# Altium PCB Copy of corePCB1.PcbDoc (part 2 of 2)
Units mil, origin at the board's own origin, x right, y up, seen from the top; angles counter-clockwise.
Board outline 6000 x 4000 mil, 4 copper layers (Top Layer, Layer 1, Layer 2, Bottom Layer), stack 23.756 mil thick; 90 components, 166 nets, 637 pads, 207 vias.
Unrouted connection lines stored in the file: 273.
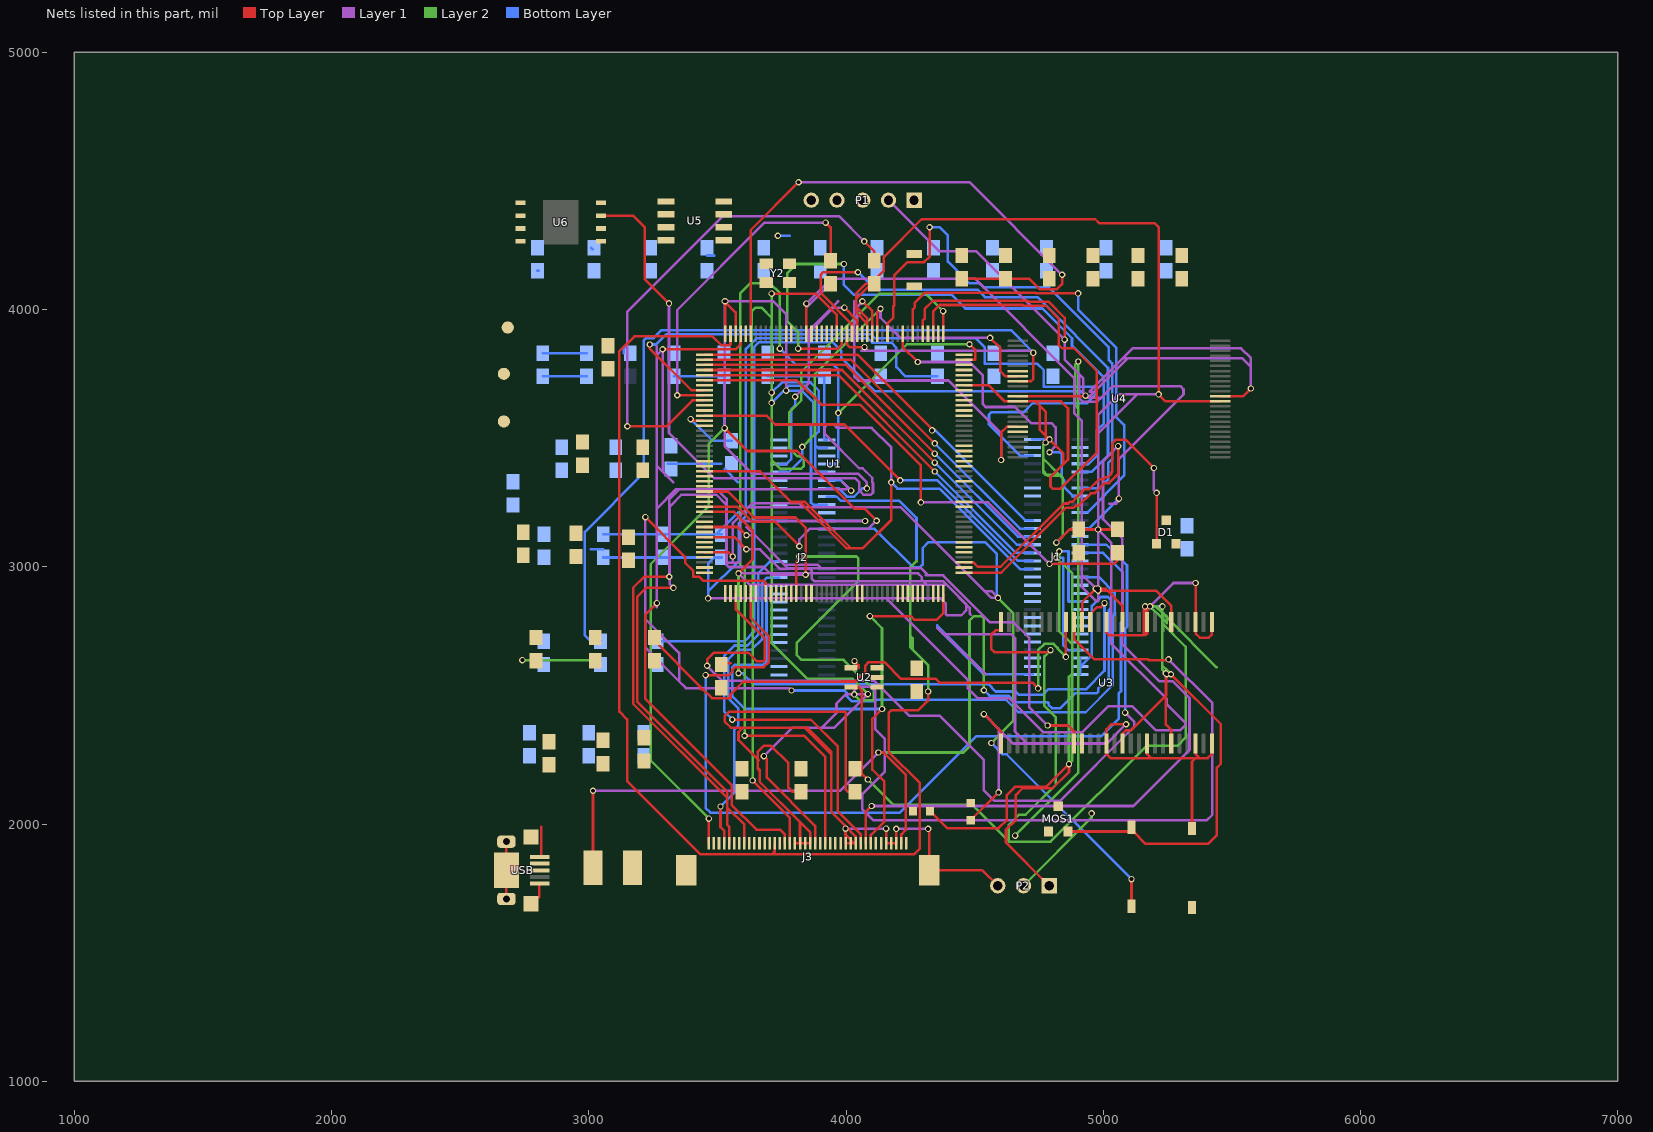
[diagram p4: the nets of this part, all layers, seen from the top]

## Via types
v1: diameter 25, hole 15, Top Layer to Bottom Layer, 207 vias

## Nets (pads, with @x,y where several pads share a name; then routed paths per layer and width w, separated by ;. In a path a pad name is that pad's centre, name@x,y a point inside that pad or via, vN(x,y) a via of type N, cw(c..) or ccw(c..) an arc to the next point about the centre after c; other vN are vias at no path point) (continued)
FMC_NCE3: R17.2 U1.152 U4.9 | length 3861.5
  Top Layer w10: U1.152@4003.76,3905.33 4003.76,3864 4013.76,3854 v1(4072,3854) ; U4.9@4667.6,3721.53 4720,3721.53 4728,3729.53 v1(4728,3831)
  Layer 1 w10: 4059,3839 4072,3839 4075,3839 4087,3839 ; v1(4072,3854) 4087,3839 ; v1(4728,3831) 4727,3832 v1@4720,3839 ; v1(4728,3833) 4722,3839 v1@4720,3839 ; 4087,3839 v1@4720,3839
  Bottom Layer w10: R17.2@3045.06,2710 3008,2710 2985,2733 2985,3136 3213.07,3364.07 3213.07,3880 3222.07,3889 3252,3889 3283,3920 4641,3920 v1(4728,3833)
FMC_NE1: J1.35 U1.151 | length 2030.6
  Top Layer w10: U1.151@4023.44,3905.33 4023.44,3942.57 3902.18,4063.84 3902.18,4136 3911.18,4145 v1(4046,4145)
  Bottom Layer w10: v1(4046,4145) 4114,4077 4511,4077 4540,4048 4745,4048 4892.7,3900.3 4892.7,3898.74 5018.5,3772.95 5018.5,3433.52 4954,3369.02 J1.35@4910,3369.02
FMC_NOE: J2.26 U1.146 U4.8 | length 1638.2
  Top Layer w10: U1.146@4121.87,3905.33 4121.87,3990.87 v1(4134,4003) ; v1(4560,3890) 4599.78,3850.22 4599.78,3760 4618.56,3741.22 U4.8@4667.6,3741.22
  Layer 1 w10: v1(4134,4003) 4134,3968 4212,3890 v1(4560,3890)
  Layer 2 w10: v1(3830,3466) 3878,3514 3878,3747 v1(4134,4003)
  Bottom Layer w10: J2.26@3740,3367.44 3776.44,3367.44 3830,3421 v1(3830,3466)
FMC_NWAIT: J2.27 U1.150 U4.7 | length 1044.2
  Top Layer w10: v1(3993.76,4007.24) 4043.13,3957.87 U1.150@4043.13,3905.33
  Layer 1 w10: v1(3802,3661) 3856,3715 3856,3911.28 ; 3969,4032 3856,3919 3856,3911.28 ; v1(3993.76,4007.24) 3951.97,4007.24 3856,3911.28
  Bottom Layer w10: J2.27@3740,3398.94 3768,3398.94 3787,3417.94 3787,3612 3802,3627 v1(3802,3661)
FMC_NWE: J2.22 U1.147 U4.18 | length 1482.9
  Top Layer w10: v1(4064,4032) 4102.19,3993.81 U1.147@4102.19,3905.33 ; v1(4603,3415) 4603,3522 4625.37,3544.37 U4.18@4667.6,3544.37
  Layer 1 w10: 4032,4032 4032,3944.28 ; v1(4064,4032) 4044.36,4012.36 4044.36,3956.64 4032,3944.28 ; v1(4603,3415) 4603,3519 4594,3528 4398,3724 4048,3724 4032,3740 4032,3944.28
FMC_SDCKE0: U1.35 U3.37 | length 2185.3
  Top Layer w10: U1.35@3450,3154.72 3577.77,3154.72 3588.99,3143.5 3592.5,3143.5 v1(3613.28,3122.72) ; v1(4784,2383) 4864,2383 4886.53,2360.47 U3.37@4886.53,2312.56
  Layer 1 w10: v1(3613.28,3122.72) 3645.28,3122.72 ; 3613.28,3154.72 3645.28,3122.72 ; v1(4784,2383) 4712,2455 4712,2724 4652,2784 4560,2784 4377.5,2966.5 4320,2966.5 ; 3645.28,3122.72 3759.5,3008.5 ; 3759.5,3008.5 3773.5,2994.5 3903.76,2994.5 ; 3759.5,3008.5 3889.76,3008.5 3903.76,2994.5 ; 3903.76,2994.5 4292,2994.5 4310.5,2976 ; 4310.5,2976 4320,2966.5 ; 4310.5,2976 4310.5,2966.5 4320,2966.5
FMC_SDCLK: U1.112 U3.38
FMC_SDNCAS: U1.160 U3.17 | length 2648.1
  Top Layer w10: U1.160@3846.28,3905.33 v1(3846.28,4023.28) ; U3.17@4918.03,2785 4918.03,2862.03 v1(4971,2915)
  Layer 1 w10: 3846.28,4007.28 3959,4120 ; v1(3846.28,4023.28) 3943,4120 3959,4120 ; 4971,2867 4917,2921 4917,2969 ; v1(4971,2915) 4917,2969 ; 3959,4120 4501,4120 4887,3734 4887,3597 4917,3567 4917,2969
FMC_SDNE0: R19.2 U1.34 U3.19 | length 2150
  Top Layer w10: R19.2@3255.06,2725 3255.06,2712.94 3434.72,2533.28 3434.72,2523.5 3444.5,2523.5 3479,2489 3551,2489 3551,2504 3600,2553 3983,2553 3984,2554 4037,2554 4075,2592 4075,2616 4088,2629 4149,2629 4214,2564 4349,2564 4363.19,2549.81 4724.19,2549.81 v1(4747,2527) ; v1(4855.04,2649.66) U3.19@4855.04,2785
  Layer 2 w10: v1(4747,2527) 4747,2675.94 4771.03,2699.97 4807.04,2699.97 4822.66,2684.35 4822.66,2682.04 v1(4855.04,2649.66)
FMC_SDNRAS: U1.59 U3.18 | length 6225.8
  Top Layer w10: U1.59@3806.91,2896.24 3806.91,3020 3819,3032.09 v1(3819,3040) ; U3.18@4886.53,2785 4886.53,2720 4966.53,2640 5175,2640 5178,2637 5251,2637 v1(5254,2640)
  Layer 1 w10: v1(4032,2504) 4032,2518 4048,2534 4096,2534 4113,2517 4113,2369 4150,2332 4150,2203 4064,2117 4064,2057 4107,2014 5402,2014 5424,2036 5424,2470 v1(5254,2640) ; 4485,2814 4480.91,2818.09 4480.91,2840.46 4392.03,2929.34 4315.66,2929.34 ; 4315.66,2929.34 3626.66,2929.34 3582,2974 4280.5,2974 4294.5,2960 4294.5,2950.5 4315.66,2929.34
  Layer 2 w10: v1(3819,3040) 4040,3040 4048,3032 4048,2944 3809,2705 3809,2656 3827,2638 3991,2638 4108.5,2520.5 4108.5,2482 4107.5,2481 4055,2481 v1(4032,2504)
FMC_SDNWE: U1.32 U3.16 | length 2661
  Top Layer w10: U1.32@3450,3213.78 3564.59,3213.78 3637,3141.37 3637,3029 v1(3582,2974) ; U3.16@4949.53,2785 4949.53,2816.53 4976,2843 4992,2843 5005,2856 v1(5005,2859)
  Layer 2 w10: v1(3582,2586) v1(3582,2974)
  Bottom Layer w10: v1(3582,2586) 3598,2586 3640.5,2543.5 4553.5,2543.5 4582,2515 4658.79,2515 4671.79,2502 4764,2502 4785.69,2523.69 4932.35,2523.69 5005,2596.34 v1(5005,2859)
GBC_KEY: J1.15 U1.13 | length 1509.1
  Top Layer w10: U1.13@3450,3587.8 3690.2,3587.8 3725,3553 3994,3553 v1(4211,3336)
  Bottom Layer w10: v1(4211,3336) 4355,3336 4668.44,3022.56 J1.15@4724.96,3022.56
GBC_LED: J1.45 U1.50 | length 3621.7
  Top Layer w10: v1(3454,2579) 3545,2579 3558,2592 3558,2600 3568,2610 3680,2610 3700.5,2630.5 3700.5,2729.72 3629.74,2800.48 U1.50@3629.74,2896.24
  Bottom Layer w10: v1(3454,2579) 3454,2063 3472.5,2044.5 4209.5,2044.5 4506,2341 4992,2341 5059.63,2408.63 5059.63,2507.5 5069,2516.87 5069,2782.27 5076.5,2789.77 5076.5,2977.43 4999.88,3054.06 J1.45@4910,3054.06
GND: C1.2 C2.1 C3.2 C4.1 C5.2 C6.1 C7.1 C8.1 C9.1 C10.1 C11.1 C12.2 C13.1 C14.1 C15.1 C16.1 C17.1 C18.1 C19.1 C20.1 C21.1 C22.1 C23.1 C24.1 C25.1 C26.1 C27.1 C28.1 C29.1 C30.1 C31.1 C32.1 C33.2 C34.2 C35.1 C36.1 C37.1 C38.1 C39.1 C40.1 C41.1 C42.1 C43.1 C44.2 C45.2 GND.1 J1.1 J1.30 J2.31 J3.3 J3.4 J3.5 J3.11 J3.12 J3.13 J3.20 J3.21 J3.22 J3.23 J3.29 J3.A J3.B P1.1 P2.3 PWR.2 R1.2 R4.2 R7.2 R14.1 RST.2 U1.14 U1.22 U1.37 U1.61 U1.71 U1.90 U1.102 U1.113 U1.126 U1.135 U1.148 U1.158 U2.2 U3.6 U3.12 U3.28 U3.41 U3.46 U3.52 U3.54 U4.13 U4.36 U5.1 U5.2 U5.3 U5.4 U5.7 U6.4 USB.5 USB.6 USB.7 USB.8 USB.9 Y2.2 Y2.4 | length 24725.8
  Top Layer w10: USB.7@2679.65,1708.78 2680,1708.78 USB.9@2680,1820 2680,1931.22 USB.6@2679.65,1931.22 ; USB.8@2775,1716 2807,1716 2807,1768.82 USB.5@2809,1768.82 ; v1(3396,3574) 3401.89,3568.11 U1.14@3450,3568.11 ; U1.37@3450,3115.35 3565.65,3115.35 v1(3613,3068) ; J3.23@3801.57,1925 J3.22@3821.26,1925 ; C31.1@3825.06,2125 3792,2125 3776,2141 3776,2236.5 3709,2303.5 3680,2303.5 3657.5,2281 3657.5,2250.5 ; v1(3998,1982) 3998,1959 3998.43,1958.57 ; C32.1@4035.06,2125 4008,2125 3999,2134 3999,2433 3996,2436 3545,2436 3528,2419 3528,2399 3552,2375 3600,2375 ; U1.148@4082.5,3905.33 4082.5,3945.5 ; C9.1@4110.06,4100 C9.1@4097.06,4100 ; v1(4155.91,1982) J3.5@4155.91,1925 J3.4@4175.59,1925 J3.3@4195.28,1925 v1(4195.28,1981.23) ; v1(4319,1981.23) 4323.23,1977 J3.A@4323.23,1821 ; J3.A@4323.23,1820.57 J3.A@4323.23,1821 ; U1.135@4338.41,3905.33 4338.41,3992.13 4363.78,4017.5 4687.56,4017.5 4690.06,4015 4776.5,4015 4826.5,3965 4826.5,3863 4840,3849.5 4885.5,3849.5 4975,3760 4975,3444.47 4834.53,3304 4803,3304 4795,3312 4795,3348.5 4845.39,3398.89 ; U1.126@4459.09,3705.91 4554.09,3705.91 ; PWR.2@4485,2015 v1(4593,2123) ; v1(4536,2427) 4603.07,2359.93 U3.28@4603.07,2312.56 ; P2.3@4590,1760 4529,1821 J3.A@4323.23,1821 ; v1(4776,3483) 4776,3510 ; v1(4818,3094) 4869,3145 R1.2@4905.06,3145 v1(4980,3145) C1.2@5055.06,3145 ; v1(4980,2907) 5016.51,2907 ; v1(4980,2915) 5008.51,2915 5016.51,2907 ; U3.12@5075.51,2785 5075.51,2848 5016.51,2907 ; v1(5089,2388) 5032.52,2388 5012.52,2368 U3.41@5012.52,2312.56 5012.52,2272 5028.52,2256 5186,2256 ; U3.46@5170,2312.56 5170,2272 5186,2256 ; U3.6@5264.49,2785 5264.49,2848 5205.49,2907 5016.51,2907 ; RST.2@5345,1982.09 5345,2242.02 5358.98,2256 ; U3.52@5358.98,2312.56 5358.98,2272 5374.98,2256 ; U3.54@5421.97,2312.56 5421.97,2272 5405.97,2256 5374.98,2256 ; U4.36@5455,3642.79 5242.21,3642.79 v1(5215,3670) 5215,4320 5199,4336 4984,4336 4969,4351 4294,4351 4146.06,4203.06 4146.06,4149 C9.1@4097.06,4100 ; 3600,2375 3582,2357 3582,2326 3657.5,2250.5 ; 3600,2375 3838,2375 ; 3657.5,2247 3661,2247 3657.5,2250.5 ; 3657.5,2247 3657,2247 3657,2214 3661,2214 ; 3657.5,2247 3657.5,2250.5 ; 3657.5,2247 3657.5,2217.5 3661,2214 ; 3661,2214 3664.73,2210.27 3664.73,2206.27 ; 3661,2214 3661,2210 3664.73,2206.27 ; 3664.73,2206.27 3664.73,2163.9 3821.26,2007.37 ; J3.22@3821.26,1925 3821.26,2007.37 ; J3.22@3821.26,1925 J3.21@3840.94,1925 J3.20@3860.63,1925 3860.63,1968 3821.26,2007.37 ; 3838,2375 3848,2375 3943,2280 3943,2270 ; 3838,2375 3943,2270 ; 3943,2047 3943,2046.8 v1@3998.43,1991.37 ; 3943,2047 3943,2270 ; 3943,2047 3998.43,1991.57 v1@3998.43,1991.37 ; 3998.43,1958.57 4032,1925 ; 3998.43,1958.57 v1@3998.43,1991.37 ; 3998.43,1958.57 J3.13@3998.43,1925 J3.12@4018.11,1925 4032,1925 ; v1@3998.43,1991.37 4037.8,1952 J3.11@4037.8,1925 4032,1925 ; 4040,4009 4040,3988 4082.5,3945.5 ; 4040,4009 4082.5,3966.5 4082.5,3945.5 ; 4040,4009 4040,4042.94 ; 4040,4042.94 C9.1@4097.06,4100 ; 4040,4042.94 4040,4064 4076,4100 C9.1@4097.06,4100 ; 4554.09,3705.91 4555,3705.91 4617.91,3643 ; 4554.09,3705.91 4617,3643 4617.91,3643 ; 4617.91,3643 4667.6,3643 4736,3643 ; 4617.91,3643 4618.11,3642.79 U4.13@4667.6,3642.79 4736,3642.79 4754,3624.79 4754,3532 4776,3510 ; 4736,3643 4836,3643 4863,3616 4863,3416.5 4845.39,3398.89 ; 4736,3643 4776,3603 4776,3510 ; 4776,3510 v1(4791,3495) 4845.39,3440.61 4845.39,3398.89 ; 5186,2256 5358.98,2256 ; 5358.98,2256 5374.98,2256
  Layer 1 w10: v1(3464,2877) 4157,2877 ; v1(3613,3068) 3666.16,3068 3741.66,2992.5 3858.5,2992.5 3867,2984 3867,2953 3877,2943 4378.37,2943 4468.19,2853.19 4468.19,2831.19 4448,2811 4391.63,2811 4387,2815.63 4387,2858 4368,2877 4157,2877 ; v1(3998,1982) v1(4155.91,1982) ; v1(4195.28,1981.23) v1(4319,1981.23) ; v1(4536,2427) 4593,2370 ; 4544.39,2581.61 4380.69,2738 ; v1(4593,2123) 4593,2370 ; 4980,2867 v1(4980,2907) v1(4980,2915) v1(4980,3145) ; v1(5089,2388) 5014,2313 4704,2313 ; v1(5215,3670) 5132,3670 ; 4157,2877 4474,2560 4474,2527 4512,2489 4634,2489 4657,2466 ; 4380.69,2738 4642,2738 4657,2723 4657,2466 ; 4380.69,2738 4379.5,2738 4354,2763.5 4380.69,2738 ; 4593,2370 4650,2313 4704,2313 ; 4657,2466 4766,2357 4919,2357 5020,2458 5111,2458 5204,2365 5300,2365 5319,2384 5319,2393 5246,2466 5246,2487 5031,2702 5031,3094 v1(4980,3145) ; 4657,2466 4657,2360 4704,2313 ; v1(4980,3145) 4980,3518 ; 4980,3518 4980,3590 5060,3670 5132,3670 ; 4980,3518 5132,3670
  Layer 2 w10: v1(4776,3483) 4767,3474 4767,3471 4767,3420 4767,3366 4776,3357 4781.5,3357 ; v1(4791,3495) 4777.5,3481.5 4767.03,3471.03 4767.03,3419.97 ; v1(4818,3094) 4843,3119 4843,3344 ; 4767.03,3419.97 4830,3357 ; 4767.03,3419.97 4767.03,3371.47 4781.5,3357 ; 4781.5,3357 4830,3357 ; 4781.5,3357 4782,3356.5 ; 4782,3356.5 4784,3354.5 4832.5,3354.5 ; 4782,3356.5 4830.5,3356.5 ; 4830,3357 4830.5,3356.5 ; 4830,3357 4832,3357 4843,3346 4843,3344 ; 4830.5,3356.5 4832.5,3354.5 ; 4832.5,3354.5 4843,3344
  Bottom Layer w10: C13.1@2800.06,4150 2803.03,4152.97 C13.1@2806,4150 ; 3007.38,3068.62 3056.38,3068.62 ; C39.1@3056.38,3036.93 3056.38,3036 3286.38,3036 3487.07,3036 ; 3136,3830.59 3136,3847 R7.2@3140.33,3851.33 ; v1(3396,3574) 3480,3490 C44.2@3555.06,3490 ; v1(3464,2877) 3464,2903 ; C41.1@3516.38,3036 3487.07,3036 ; C41.1@3516.38,3036.93 3488,3036.93 3487.07,3036 ; C10.1@3696.07,3740.59 3696.07,3740 C11.1@3916.07,3740 ; C11.1@3916.07,3740.59 C11.1@3916.07,3740 ; J2.31@3925.04,3493.43 3916.07,3493.43 C11.1@3916.07,3740 ; 4354,2763.5 4535.89,2581.61 4544.39,2581.61 ; 4354,2772 4544.39,2581.61 ; R14.1@4355.06,3740 4232,3740 4196,3776 4196,3851 4176,3871 4102.5,3871 4085.5,3888 3652,3888 3611,3847 3611,3197 3584,3170 3584,3023 3464,2903 ; J1.1@4724.96,2581.61 4544.39,2581.61 ; J1.30@4724.96,3495 v1(4791,3495) ; 3464,2903 3464,3012.93 3487.07,3036
IIC_SCL: J1.8 R20.1 U1.45 U5.6
IIC_SDA: J1.7 R21.1 U1.46 U5.5
JTCK: J1.42 P1.2 U1.137 | length 3308.7
  Top Layer w10: U1.137@4299.04,3905.33 4299.04,3958 4305.84,3964.8 4305.84,4002.1 4337.24,4033.5 4706.06,4033.5 4708.56,4031 4787,4031 4850,3968 v1(4850,3883)
  Layer 1 w10: P1.2@4165,4425 4364,4226 4507,4226 v1(4850,3883) 4850,3851 4850,3805 4907.5,3747.5 ; 5023,3245 5050,3245 5061,3256 v1(5061,3265) 5061,3419 5312,3670 5312,3690 5300,3702 5037,3702 4992.67,3657.67 ; 4907.5,3747.5 4923,3732 4923,3670.67 4936,3657.67 4992.67,3657.67 ; 4907.5,3747.5 4907.5,3654.17 4920,3641.67 4976.67,3641.67 4992.67,3657.67
  Bottom Layer w10: J1.42@4910,3148.54 4944.54,3148.54 v1(5061,3265)
JTMS: J1.43 P1.3 U1.124
KEY0: J1.6 U1.44
KEY1: J1.5 U1.43
KEY2: J1.28 U1.8 | length 2939.6
  Top Layer w10: v1(3237,3864) 3237,3848 3398.78,3686.22 U1.8@3450,3686.22
  Bottom Layer w10: v1(3237,3864) 3261.82,3864 3301.82,3904 4096.5,3904 4111.5,3889 4504,3889 4539,3854 4539,3789 4744,3789 4769,3764 4769,3699 4967.5,3699 4970.5,3696 4970.5,3669.5 4937,3636 4726,3636 4690,3600 4564,3600 4556,3592 4556,3553 4676.99,3432.01 J1.28@4724.96,3432.01
LCD_B3: J2.35 J3.24 U1.154 | length 3564.3
  Top Layer w10: v1(3637,2169) 3781.89,2024.11 J3.24@3781.89,1925 ; v1(3711,4062) 3881.39,4062 3964.39,3979 U1.154@3964.39,3905.33
  Layer 2 w10: v1(3637,2169) 3637,3227 3633,3231 3633,3992 3648,4007 3672,4007 3711,3968 ; v1(3711,3637) 3711,3968 ; v1(3711,4062) 3711,3968
  Bottom Layer w10: v1(3711,3637) 3777,3703 3840,3703 3880,3663 3880,3375.44 3888,3367.44 J2.35@3925.04,3367.44
LCD_B4: J2.36 J3.25 U1.173 | length 4131.7
  Top Layer w10: v1(3265,2859) 3219,2813 3219,2488 3555.18,2151.82 3555.18,2074 3651.18,1978 3744,1978 3762.2,1959.8 J3.25@3762.2,1925 ; v1(3286.85,3845.85) 3572.23,3845.85 3590.37,3864 U1.173@3590.37,3905.33
  Layer 1 w10: 3265,2843 v1(3265,2859) 3265,3227 ; 3265,3856 3265,3824 ; 3329,3328 3286.85,3370.15 ; 3988,3328 v1@4014,3302 ; v1(4020,3296) v1@4014,3302 ; 3265,3227 3265,3392 ; 3265,3227 3340,3302 v1@4014,3302 ; 3265,3392 3286.85,3370.15 ; 3265,3392 3265,3824 ; 3265,3824 v1(3286.85,3845.85) 3286.85,3370.15
  Bottom Layer w10: J2.36@3925.04,3335.94 3980.06,3335.94 v1(4020,3296)
LCD_B5: J2.37 J3.26 U1.174 | length 1524.7
  Top Layer w10: v1(3528,4032) 3570.69,3989.31 U1.174@3570.69,3905.33
  Layer 1 w10: v1(3528,4032) 3528,3469 3636,3361 4048,3361 4081,3328 v1(4081,3304.45)
  Bottom Layer w10: J2.37@3925.04,3304.45 3972.05,3304.45 4004,3272.5 4032.05,3272.5 4064,3304.45 v1(4081,3304.45)
LCD_B6: J2.38 J3.27 U1.175 | length 5445.8
  Top Layer w10: U1.175@3551,3905.33 3551,3864.86 3548,3861.85 3515,3861.85 3480.85,3896 3177,3896 3119,3838 3119,2437 3149,2407 3149,2168 3435,1882 3712,1882 ; J3.27@3722.83,1925 3722.83,1892.83 3712,1882 ; v1(4319,2515) 4319,2480 4280.5,2441.5 4175.5,2441.5 4166,2432 4166,2280 4287,2159 4287,1904 4265,1882 3712,1882
  Layer 2 w10: 4274,3022 4273,3021 4250,2998 4250,2730 ; v1(4319,2515) 4319,2617.71 4258.71,2678 ; 4250,2730 4250,2686.71 4258.71,2678 ; 4250,2730 4258.71,2721.29 4258.71,2678
  Bottom Layer w10: J2.38@3925.04,3272.95 3964.05,3272.95 3980.5,3256.5 4207.5,3256.5 4274,3190 4274,3022
LCD_B7: J2.39 J3.28 U1.176 | length 1263.3
  Top Layer w10: U1.176@3531.32,3905.33 v1(3531.32,4032)
  Layer 1 w10: v1(3531.32,4032) 3718,4032 3767,3983 v1(3767,3685)
  Bottom Layer w10: v1(3767,3685) 3827,3685 3873,3639 3873,3556 3864,3547 3864,3249.46 3872,3241.46 J2.39@3925.04,3241.46
LCD_BL: J1.23 J3.34 U1.163
LCD_CLK: J3.30 U1.111
LCD_DE: J3.33 U1.28 | length 3054.2
  Top Layer w10: v1(3329,2918) 3223,2918 3189,2884 3189,2475.18 3539.18,2125 3539.18,2062.82 3604.72,1997.28 J3.33@3604.72,1925 ; U1.28@3450,3292.52 3540.48,3292.52 3641.5,3191.5 3803.5,3191.5 3843,3152 v1(3843,2969)
  Layer 1 w10: v1(3329,2918) 3315,2932 3315,3235 3360,3280 3496,3280 3535,3241 3535,3008 3544,2999 3680,2999 3710,2969 v1(3843,2969)
LCD_G2: J2.30 J3.14 U1.128
LCD_G3: J2.29 J3.15 U1.129
LCD_G4: J2.28 J3.16 U1.130
LCD_G5: J2.34 J3.17 U1.131 | length 4216.3
  Top Layer w10: v1(3606,2343) 3838,2343 3919.69,2261.31 J3.17@3919.69,1925 ; U1.131@4459.09,3804.33 4503,3804.33 4503,3842 v1(4480,3865)
  Layer 2 w10: v1(3606,2343) 3606,2988 3589,3005 3589,4064 3627,4102 3705,4102 3743,4064 v1(3743,3848) ; v1(3970,3598) 4237,3865 v1(4480,3865)
  Bottom Layer w10: v1(3743,3848) 3806,3785 3952,3785 3970,3767 v1(3970,3598) 3970,3408 3960.94,3398.94 J2.34@3925.04,3398.94
LCD_G6: J2.33 J3.18 U1.132
LCD_G7: J2.32 J3.19 U1.133 | length 4442.5
  Top Layer w10: v1(3681,2264) 3692.63,2252.37 3692.63,2180.77 3880.32,1993.08 J3.19@3880.32,1925 ; U1.133@4377.78,3905.33 v1(4377.78,3994)
  Layer 1 w10: v1(3681,2264) 3792,2375 3906,2375 ; 3906,2375 3955,2375 v1(4085,2505) 4000,2505 3963,2468 3963,2432 3906,2375
  Layer 2 w10: v1(3711,3677) 3711,3414.5 ; v1(4085,2505) 4026,2564 3850,2564 3711,2703 3711,3266.5 3711,3414.5 ; v1(4377.78,3994) 4309.78,4062 4131,4062 3826,3757 3826,3647 3779.96,3600.96 3779.96,3460.66 3811.63,3429 3822,3429 3823,3428 3824.5,3428 3836.5,3416 3836.5,3392 3826,3381.5 3744,3381.5 3711,3414.5
  Bottom Layer w10: v1(3711,3677) 3751,3717 3862,3717 3894,3685 3894,3525 3880,3511 3880,3472.93 3891,3461.93 J2.32@3925.04,3461.93
LCD_HSYNC: J3.31 U1.12
LCD_R3: J2.10 J3.6 U1.86
LCD_R4: J2.11 J3.7 U1.87
LCD_R5: J2.12 J3.8 U1.88 | length 2843.3
  Top Layer w10: v1(4093,2808) 4252.5,2808 4267,2793.5 4352.28,2793.5 4377.78,2819 U1.88@4377.78,2896.24 ; J3.8@4096.85,1925 4096.85,1957.85 4149,2010 4149,2165 4102,2212 4102,2408.5 v1(4140.5,2447)
  Layer 2 w10: v1(4093,2808) 4140,2761 ; v1@4140,2459 4140,2761 ; v1(4140.5,2447) 4140.5,2760.5 4140,2761
  Bottom Layer w10: J2.12@3740,2926.5 3691,2926.5 3691,2630.5 3680,2619.5 3568,2619.5 3558,2609.5 3558,2496 3607,2447 v1(4140.5,2447)
LCD_R6: J2.24 J3.9 U1.89 | length 3722.3
  Top Layer w10: J3.9@4077.17,1925 4077.17,2047.75 v1(4099.33,2069.92) ; U1.89@4459.09,2977.56 4603.56,2977.56 4855.5,3229.5 4885.71,3229.5 4893.57,3237.36 4904,3237.36 4952.26,3285.62 4966.07,3285.62 5005.43,3324.99 5023.25,3324.99 5058,3359.74 v1(5058,3469)
  Layer 1 w10: v1(4099.33,2069.92) 5116.92,2069.92 5335.48,2288.48 5335.48,2489.52 5270.5,2554.5 5218.13,2554.5 5074.08,2698.55 5074.08,3109.92 4999,3185 4999,3410 v1(5058,3469)
LCD_R7: J2.15 J3.10 U1.110 | length 1633.8
  Top Layer w10: v1(3558,2406) 3863,2406 3968,2301 3968,2049.48 4057.48,1960 J3.10@4057.48,1925
  Bottom Layer w10: v1(3558,2406) 3526,2438 3526,2653 3567,2694 3617,2694 3659,2736 3659,2976 3703.98,3020.98 J2.15@3740,3020.98
LCD_VSYNC: J3.32 U1.11
LED0: DS0.2 J1.57 U1.57 | length 1999
  Top Layer w10: DS0.2@4326.93,2050 4392.93,1984 4593,1984 4625,2016 4625,2112 4657,2144 4778,2144 v1(4867,2233)
  Layer 2 w10: v1(4818,3035) 4879.95,2973.05 4879.95,2245.95 v1(4867,2233)
  Bottom Layer w10: v1(4818,3035) 4844,3035 4844,2696.1 4864,2676.1 J1.57@4910,2676.1
LED1: J1.56 U1.56
NetC1_1: C1.1 D1.3 U1.6 | length 2021.8
  Top Layer w10: U1.6@3450,3725.59 3808.41,3725.59 3904,3630 4055,3630 4291,3394 v1(4291,3250) ; v1(4791,3011) 5042.06,3011 5055.06,3024 C1.1@5055.06,3055
  Layer 1 w10: v1(4291,3250) 4552,3250 v1(4791,3011)
NetC2_2: C2.2 C4.2 R2.1 U1.38
NetC3_1: C3.1 U1.81
NetC5_1: C5.1 U1.125
NetC8_2: C8.2 U1.9 Y1.1 | length 1311.2
  Top Layer w10: v1(3344,3666.54) U1.9@3450,3666.54 ; v1(3921,4338) 3940.06,4318.94 C8.2@3940.06,4190
  Layer 1 w10: v1(3344,3666.54) 3344,3998 3684,4338 v1(3921,4338)
NetC9_2: C9.2 U1.10 Y1.2 | length 1993.4
  Top Layer w10: v1(3150,3546) 3302.15,3546 3403,3646.85 U1.10@3450,3646.85 ; v1(4071,4265) 4110.06,4225.94 C9.2@4110.06,4190
  Layer 1 w10: v1(3150,3546) 3150,3992 3520,4362 3974,4362 v1(4071,4265)
NetC10_2: C10.2 U1.30 Y2.1
NetC11_2: C11.2 U1.29 Y2.3 | length 45.6
  Bottom Layer w10: v1(3735,4287) 3780.55,4287
NetC28_2: C28.2 J3.1
NetC29_2: C29.2 F1.2 U2.1 U2.3 | length 40.3
  Top Layer w10: C29.2@3515,2615 3525.5,2625.5 3551,2625.5
NetC30_2: C30.2 U2.4 | length 32.2
  Top Layer w10: v1(4033,2633) 4049,2617 4049,2607.4
NetC35_2: C35.2 C36.2 R16.1 U4.12 U4.37 | length 4879.7
  Top Layer w10: U4.12@4667.6,3662.48 4928.31,3662.48 v1(4931,3665.17) ; U4.37@5455,3662.48 5543.48,3662.48 v1(5574,3693)
  Layer 1 w10: v1(4931,3665.17) 4949.69,3665.17 4965.69,3681.17 ; 4947,3681.17 4965.69,3681.17 ; 4947,3682 5076,3811 ; v1(5574,3693) 5574,3776 ; 4965.69,3681.17 5095.52,3811 ; 5076,3811 5114,3849 5536,3849 5574,3811 5574,3776 ; 5076,3811 5095.52,3811 ; 5095.52,3811 5539,3811 5574,3776
  Bottom Layer w10: C35.2@3265.06,2710 3605.5,2710 3643,2747.5 3643,3855 3660,3872 3949.05,3872 3981.05,3840 3981.05,3812.95 4112,3682 4914.17,3682 v1(4931,3665.17)
NetDS0_1: DS0.1 R10.2
NetMOS1_1: MOS1.1 R13.2 R14.2 | length 2138.4
  Layer 2 w10: v1(4657.21,1954.79) 4903,2200.58 4903,3614.17 ; 4903,3614.17 v1(4903,3798) 4891.5,3786.5 4891.5,3625.67 4903,3614.17
NetPWR_1: PWR.1 R15.1
NetR1_1: R1.1 U1.48
NetR4_1: R4.1 R5.1 U1.171 | length 2291.1
  Top Layer w10: U1.171@3629.74,3905.33 3629.74,4308.74 v1(3816,4495) ; R5.1@4450.06,4120 R4.1@4620.06,4120 4712,4120 4753,4079 4820,4079 4840,4099 v1(4840,4135)
  Layer 1 w10: v1(3816,4495) 4480,4495 v1(4840,4135)
NetR11_2: R11.2 USB.3
NetR12_2: R12.2 USB.2
NetR18_1: R18.1 U4.19 | length 305
  Layer 2 w10: v1(2742,2637) 3047,2637
NRF_CE: J2.25 U1.155
NRF_CS: J1.34 U1.153 | length 2415.2
  Top Layer w10: v1(3814,3848) 3968,3848 3984.07,3864.07 U1.153@3984.07,3905.33
  Layer 2 w10: v1(3814,3848) 3814,3913 3771,3956 3771,4140 3808,4177 v1(3992,4177)
  Bottom Layer w10: v1(3992,4177) 3992,4096 4030,4058 4410,4058 4464,4004 4763,4004 4878.7,3888.3 4878.7,3859.52 5002.5,3735.72 5002.5,3556.5 4974.84,3528.84 4974.84,3431.36 4944,3400.51 J1.34@4910,3400.51
PA0: J2.42 U1.40 WKUP.1 | length 4239.1
  Top Layer w10: U1.40@3450,3056.3 3543.7,3056.3 v1(3560,3040) ; WKUP.1@5110,1680 v1(5110,1786)
  Layer 1 w10: 3560,3024 v1(3560,3040) 3560,3171 3621,3232 ; 3621,3232 3833,3232 ; 3621,3232 3635.5,3246.5 3818.5,3246.5 3833,3232 ; 3833,3232 4212,3232 4539,2905 ; 4539,2905 4565,2905 v1(4591,2879) 4565,2879 4539,2905
  Layer 2 w10: v1(4565,2315) 4650,2400 4650,2820 v1(4591,2879)
  Bottom Layer w10: J2.42@3925.04,3146.97 4111.53,3146.97 4260,2998.5 4288.5,2998.5 4298,3008 4298,3072 4321.62,3095.62 4540.76,3095.62 4585.31,3051.07 4585.31,2884.69 v1(4591,2879) ; v1(4565,2315) 4608.98,2271.02 4624.98,2271.02 v1(5110,1786)
PA1: J1.3 U1.41
PA3: J1.44 U1.47 | length 3510.9
  Top Layer w10: v1(3460,2615) 3460,2640 3486,2666 3620,2666 3654,2632 3678.5,2632 3684.5,2638 3684.5,2721.22 3570.69,2835.03 U1.47@3570.69,2896.24
  Layer 1 w10: v1(3460,2615) 3518,2557 4109,2557 4246,2420 4365,2420 4535,2250 4535,2132 4576,2091 4833,2091 5120,2378 5120,2398 v1(5085,2433) v1@5083,2435
  Bottom Layer w10: J1.44@4910,3085.55 5012.47,3085.55 5092.5,3005.52 5092.5,2766.27 5085,2758.77 v1(5085,2433)
PA5: J1.46 U1.51
PA7: J1.48 U1.53 | length 3942.1
  Top Layer w10: v1(3220,3193) 3375,3038 3375,3015.63 3406.52,2984.11 3406.52,2961.56 3429.07,2961.56 3445.63,2945 3680,2945 3688.8,2936.2 U1.53@3688.8,2896.24
  Layer 1 w10: v1(3220,3193) 3220,2796 ; v1(3788,2519) 3779,2528 3378,2528 3351,2555 ; 3220,2796 3220,2686 3351,2555 ; 3220,2796 3351,2665 3351,2555
  Bottom Layer w10: v1(3788,2519) 3994,2519 4003.55,2509.45 4003.55,2496 4021.55,2478 4112,2478 4117,2483 4622,2483 4670.51,2434.49 4931.99,2434.49 5037,2539.5 5037,2806.77 5044.5,2814.27 5044.5,2898.07 4983,2959.57 J1.48@4910,2959.57
PA9: J1.51 P2.1 U1.120 | length 1841.2
  Top Layer w10: P2.1@4790,1760 4622,1928 4622,1978 4660,2016 4660,2113 4686,2139 4803,2139 4867,2203 v1(4867,2233)
  Layer 2 w10: v1(4829,3060) 4829,2749 4879,2699 4879,2584 4867,2572 v1(4867,2233)
  Bottom Layer w10: v1(4829,3060) 4865,3060 4865,2865.08 J1.51@4910,2865.08
PA10: J1.52 P2.2 U1.121 | length 390.8
  Layer 2 w10: P2.2@4690,1760 4955,2025 v1(4955,2041)
PA11: J1.53 R11.1 U1.122
PA12: J1.54 R12.1 U1.123
PB2: J1.55 U1.58 U6.6
PB6: J1.24 U1.164 U6.1
PB10: J2.2 U1.79
PB11: J2.1 U1.80
PB13: J2.5 U1.93
PB14: J2.6 U1.94
PB15: J2.7 U1.95
PC4: J1.49 U1.54
PC5: J1.50 U1.55
PC10: J1.40 U1.139 | length 1789.6
  Top Layer w10: U1.139@4259.67,3905.33 4259.67,4000.67 4267.86,4008.86 4267.86,4027.08 4306.28,4065.5 4735.56,4065.5 4738.06,4063 v1(4902.13,4063)
  Bottom Layer w10: v1(4902.13,4063) 4902.13,3999.87 5050.5,3851.5 5050.5,3582.5 5081.5,3551.5 5081.5,3355.04 4938,3211.54 J1.40@4910,3211.54
PC12: J1.38 U1.141 | length 1208
  Top Layer w10: U1.141@4220.3,3905.33 4220.3,3854.7 v1(4279,3796)
  Layer 1 w10: v1(4279,3796) 4480,3796 4532,3744 4532,3632 4543,3621 4657,3621 4720,3558 4799,3558 4815,3542 4815,3469 v1(4791,3445)
  Bottom Layer w10: v1(4791,3445) 4832.77,3445 4839,3438.77 4839,3346 4849,3336 4849,3307.53 4882,3274.53 J1.38@4910,3274.53
PD2: J1.37 U1.144 | length 2118.4
  Top Layer w10: U1.144@4161.24,3905.33 4161.24,3945.06 4184.47,3968.29 4184.47,4011.67 4186.8,4014 4186.8,4131.8 4239,4184 4304,4184 4325,4205 v1(4325,4320)
  Bottom Layer w10: v1(4325,4320) 4364,4320 4396,4288 4396,4186 4480,4102 4519,4102 4534,4087 4787,4087 5022,3852 5022,3803.5 5034.5,3791 5034.5,3418.5 5019,3403 5019,3339.02 4986,3306.02 J1.37@4910,3306.02
PE2: J1.20 U1.1 | length 1541.7
  Top Layer w10: U1.1@3450,3824.02 4045.98,3824.02 4335,3535 v1@4342.44,3535
  Bottom Layer w10: v1@4342.44,3535 4697.4,3180.04 J1.20@4724.96,3180.04
  other v1: 4335,3530
PE3: J1.19 U1.2 | length 1546.6
  Top Layer w10: U1.2@3450,3804.33 4020.42,3804.33 v1(4344.95,3479.8)
  Bottom Layer w10: v1(4344.95,3479.8) 4676.21,3148.54 J1.19@4724.96,3148.54
PE4: J1.18 U1.3 | length 1551.7
  Top Layer w10: U1.3@3450,3784.65 4000.73,3784.65 4167.88,3617.5 4167.88,3617.12 v1(4345,3440)
  Bottom Layer w10: v1(4345,3440) 4667.95,3117.05 J1.18@4724.96,3117.05
PE5: J1.17 U1.4 | length 1556.4
  Top Layer w10: U1.4@3450,3764.96 3985.04,3764.96 v1(4345,3405)
  Bottom Layer w10: v1(4345,3405) 4664.45,3085.55 J1.17@4724.96,3085.55
PE6: J1.16 U1.5 | length 1561.3
  Top Layer w10: U1.5@3450,3745.28 3970,3745.28 v1(4345,3370.28)
  Bottom Layer w10: v1(4345,3370.28) 4661.22,3054.06 J1.16@4724.96,3054.06
PF6: J1.14 U1.24 U6.7 | length 5081.6
  Top Layer w10: U6.7@3047.99,4365 3172,4365 3217,4320 3217,4119 v1(3312,4024) ; U1.24@3450,3371.26 3666,3371.26 ; v1(4176,3328) 4176,3183 ; 3666,3371.26 3666.35,3371.26 3785.61,3252 ; 3666,3371.26 3785.26,3252 3785.61,3252 ; 3785.61,3252 3840,3252 4020,3072 ; 3785.61,3252 3785.83,3251.78 3821.83,3251.78 4001.61,3072 4020,3072 ; 4020,3072 4065,3072 ; 4065,3072 4065.61,3072 4176,3182.39 4176,3183 ; 4065,3072 4176,3183
  Layer 1 w10: v1(3312,4024) 3312,3520 3487.5,3344.5 4035.5,3344.5 4052,3328 4052,3296 4068,3280 4097,3280 4105,3288 4105,3325 4102,3328 4102,3346 4065,3383 4051,3383 3917.76,3516.24 3917.76,3544 3926,3552.24 3952.76,3552.24 3965,3540 4099,3540 4176,3463 v1(4176,3328)
  Bottom Layer w10: v1(4176,3328) 4200,3304 4364.37,3304 4677.31,2991.06 J1.14@4724.96,2991.06
PF7: J1.13 U1.25 U6.3
PF8: J1.12 U1.26 U6.5
PF9: J1.11 U1.27 U6.2
PG3: J2.13 J3.37 U1.107 | length 1223.7
  Top Layer w10: v1(3512,2068) 3512,1987.89 3525.98,1973.91 J3.37@3525.98,1925
  Bottom Layer w10: v1(3512,2068) 3566,2122 3566,2367 3581.5,2382.5 3581.5,2449.5 3542,2489 3542,2638.83 3581.17,2678 3633,2678 3675,2720 3675,2939.68 3693.32,2957.99 J2.13@3740,2957.99
PG13: J1.33 U1.156
PG14: J1.32 U1.157
PH6: J2.8 J3.38 U1.83
PH7: J2.9 J3.39 U1.84
PI3: J2.41 J3.36 U1.134 | length 2948.1
  Top Layer w10: v1(3313,2961) 3215,2961 3173,2919 3173,2467.18 3539.18,2101 3539.18,1996.49 3545.67,1990 J3.36@3545.67,1925
  Layer 1 w10: v1(3313,2961) 3313,3264 3350,3301 3499,3301 3536,3264 3536,3023 3544,3015 3580,3015 3589,3024 3589,3172 3595,3178 v1(4074,3178)
  Bottom Layer w10: J2.41@3925.04,3178.46 4073.54,3178.46 v1(4074,3178)
PI8: J2.40 J3.35 U1.7
RESET: C12.1 J1.10 J3.40 P1.5 R6.1 RST.1 U1.31 | length 3753.9
  Top Layer w10: U1.31@3450,3233.46 3576.91,3233.46 3634.87,3175.5 3723.5,3175.5 v1(3819,3080) ; J3.40@3466.93,1925 v1(3466.93,2021) ; v1(3528,3539) 3617,3450 3809,3450 4033,3226 4072,3226 v1(4119,3179)
  Layer 1 w10: v1(3819,3080) 3819,3107 3860,3148 4088,3148 v1(4119,3179)
  Layer 2 w10: v1(3466.93,2021) 3241,2246.93 3241,3010 3466,3235 3466,3477 v1(3528,3539)
  Bottom Layer w10: C12.1@3331.07,3740.59 3331.07,3740 R6.1@3526.07,3740 ; R6.1@3526.07,3740.59 R6.1@3526.07,3740 ; v1(3528,3539) 3526.07,3540.93 R6.1@3526.07,3740
VBAT: D1.2 J1.29
VCC: R16.2 R20.2 R21.2
VCC3.3: 3.3V.1 C31.2 C32.2 C37.2 C38.2 C39.2 C40.2 C41.2 C42.2 C43.2 C44.1 C45.1 MOS1.2 P1.4 R6.2 R8.1 R9.1 R17.1 R18.2 R19.1 U2.5 U3.1 U3.3 U3.9 U3.14 U3.27 U3.43 U3.49 U5.8 U6.8 WKUP.2 | length 8643.7
  Top Layer w10: U2.5@4020,2532.6 4048.4,2532.6 4061,2520 4061,2197 v1(4085,2173) ; U3.27@4603.07,2785 4603.07,2754 4582.5,2754 4564.5,2736 4564.5,2680 4576.48,2668.02 4787.02,2668.02 v1(4795,2676) ; MOS1.2@4862.4,1970.79 WKUP.2@5117.21,1970.79 ; U3.14@5012.52,2785 5012.52,2744 5022.02,2734.5 5153.5,2734.5 5158,2739 v1@5158,2841 ; U3.43@5075.51,2312.56 5075.51,2352 5087.51,2364 5108,2364 5243.15,2499.15 ; WKUP.2@5110,1987.09 5110,1978 WKUP.2@5117.21,1970.79 ; v1(5163,2846) 5163,2733 5170,2740 U3.9@5170,2785 5170,2834 v1(5182,2846) ; v1(5243.15,2585.85) 5243.15,2499.15 ; v1(5244.43,2584.57) 5244.43,2500.43 5243.15,2499.15 ; v1(5247,2582) v1(5263,2582) 5456.84,2388.16 5456.84,2233.91 5441,2218.06 5441,1956 5408,1923 5165,1923 WKUP.2@5117.21,1970.79 ; U3.49@5264.49,2312.56 5264.49,2365 5243.15,2386.34 5243.15,2499.15 ; v1(5358.98,2937) U3.3@5358.98,2785 5358.98,2741.02 5376,2724 5409.97,2724 5421.97,2736 U3.1@5421.97,2785
  Layer 1 w10: v1(5182,2846) 5273,2937 v1(5358.98,2937)
  Layer 2 w10: v1(4085,2173) 4183,2075 4489.29,2075 4633,1931.29 ; v1(4795,2676) 4771,2652 4771,2459 4816,2414 4816,2154 4698,2036 4672,2036 4633,1997 4633,1931.29 ; v1@5158,2841 v1(5163,2846) v1(5182,2846) ; v1(5230,2846) 5230,2823 ; v1(5247,2582) v1(5244.43,2584.57) v1(5243.15,2585.85) 5230,2599 5230,2615 ; v1(5263,2582) 5255,2590 5247,2598 5230,2615 ; 5441,2609 5247,2803 ; 4633,1931.29 4795.29,1931.29 5168,2304 5288,2304 5320,2336 5320,2689 5230,2779 ; v1(5182,2846) 5204,2846 ; v1(5182,2846) 5230,2798 ; 5204,2846 5207,2846 5218.5,2834.5 5230,2823 ; 5204,2846 5230,2820 ; 5230,2615 5230,2779 ; 5230,2779 5230,2798 ; 5230,2798 5230,2820 ; 5230,2798 5247,2781 5247,2803 ; 5230,2820 5230,2823 ; 5230,2820 5247,2803 ; 5230,2823 5247,2806 ; 5247,2803 5248.5,2804.5 5247,2806 ; 5247,2803 5247,2806
  Bottom Layer w10: R9.1@2821.07,3740.59 2821.07,3740 2991.07,3740 R8.1@2991.07,3740.59 ; C39.2@3056.38,3126.93 3056.38,3127 3286.38,3127 C40.2@3286.38,3126.93 3286.38,3126 3516.38,3126 C41.2@3516.38,3126.93 ; C45.1@3308,3400 3515,3400 ; C41.2@3496.93,3126.93 3581,3211 ; 3529,3380 3581,3328 ; v1(5182,2846) v1(5230,2846)
VCC3.3M: C13.2 C14.2 C15.2 C16.2 C17.2 C18.2 C19.2 C20.2 C21.2 C22.2 C23.2 C24.2 C25.2 C26.2 C27.2 D1.1 R3.2 R5.2 R8.2 R9.2 U1.15 U1.23 U1.36 U1.49 U1.62 U1.72 U1.82 U1.91 U1.103 U1.114 U1.127 U1.136 U1.149 U1.159 U1.172 | length 1569.6
  Top Layer w10: U1.91@4459.09,3016.93 4495.07,3016.93 4512,3000 4601,3000 4847,3246 4864,3246 4870,3252 4879.64,3252 4895,3267.36 4895,3268.43 4919,3292.43 4919,3292.62 4928,3301.62 4945.62,3301.62 4983.9,3339.9 4998.32,3339.9 5006,3347.58 5018.16,3347.58 5030.58,3360 5030.58,3365.58 5034.5,3369.5 5034.5,3480 5047.5,3493 5088,3493 v1(5197,3384) ; D1.1@5207.6,3088.74 v1(5207.6,3287.4)
  Layer 1 w10: v1(5197,3384) 5197,3298 v1(5207.6,3287.4)
  Bottom Layer w10: R9.2@2821.07,3830.59 2821.07,3830 2991.07,3830 R8.2@2991.07,3830.59 ; C14.2@3009,4240 C14.2@3014.53,4234.47 ; C16.2@3460.06,4210 3488,4210
VCC5: 5V.1 C33.1 F1.1 J1.58 J1.59 J1.60 J3.2 USB.1 | length 4493.7
  Top Layer w10: USB.1@2816,1871.18 2816,1990 ; F1.1@3016.46,1830 v1(3016.46,2129) ; v1(4126,2278) 4145.37,2278 4231.59,2191.78 4231.59,1976.63 4214.96,1960 J3.2@4214.96,1925
  Layer 1 w10: v1(3016.46,2129) 3977,2129 v1(4126,2278)
  Layer 2 w10: v1(4126,2278) 4456,2278 4480,2302 4480,2791 4496,2807 4528,2807 4536,2799 v1(4536,2520)
  Bottom Layer w10: v1(4536,2520) 4557,2499 4631,2499 4656,2474 4783,2474 4788,2469 4788,2462.49 4800,2450.49 4833.49,2450.49 4890.69,2507.69 4973,2507.69 4981,2515.69 4981,2528 5021,2568 5021,2830 5028.5,2837.5 5028.5,2872 5018,2882.5 4990.5,2882.5 4956,2848 4956,2656 J1.59@4910,2610 ; J1.60@4910,2581.61 J1.59@4910,2610 ; J1.58@4910,2644.61 J1.59@4910,2613.11 J1.59@4910,2610
VCC_LED: C34.1 MOS1.3 R10.1 R15.2
VDDA: C6.2 C7.2 R2.2 R3.1 U1.39
VREF+: J1.2 R13.1
pads on no net: U3.40 U4.1 U4.2 U4.3 U4.4 U4.5 U4.6 U4.10 U4.11 U4.14 U4.15 U4.20 U4.21 U4.22 U4.23 U4.24 U4.25 U4.26 U4.27 U4.28 U4.33 U4.34 U4.35 U4.38 U4.39 U4.40 U4.45 U4.46 U4.47 U4.48 U6.9 USB.4

## Text inside footprints (layer, text, board x,y; h text height)
J3: Top Overlay "1" at 4238.65,1984 h30 r180; Top Overlay "40" at 3490.65,1988 h30 r180